# Altium PCB ESP12E.PcbDoc
Units mm, origin at the board's own origin, x right, y up, seen from the top; angles counter-clockwise.
Board outline 24.13 x 27.94 mm, 2 copper layers (Top Layer, Bottom Layer); 14 components, 22 nets, 70 pads, 7 vias.
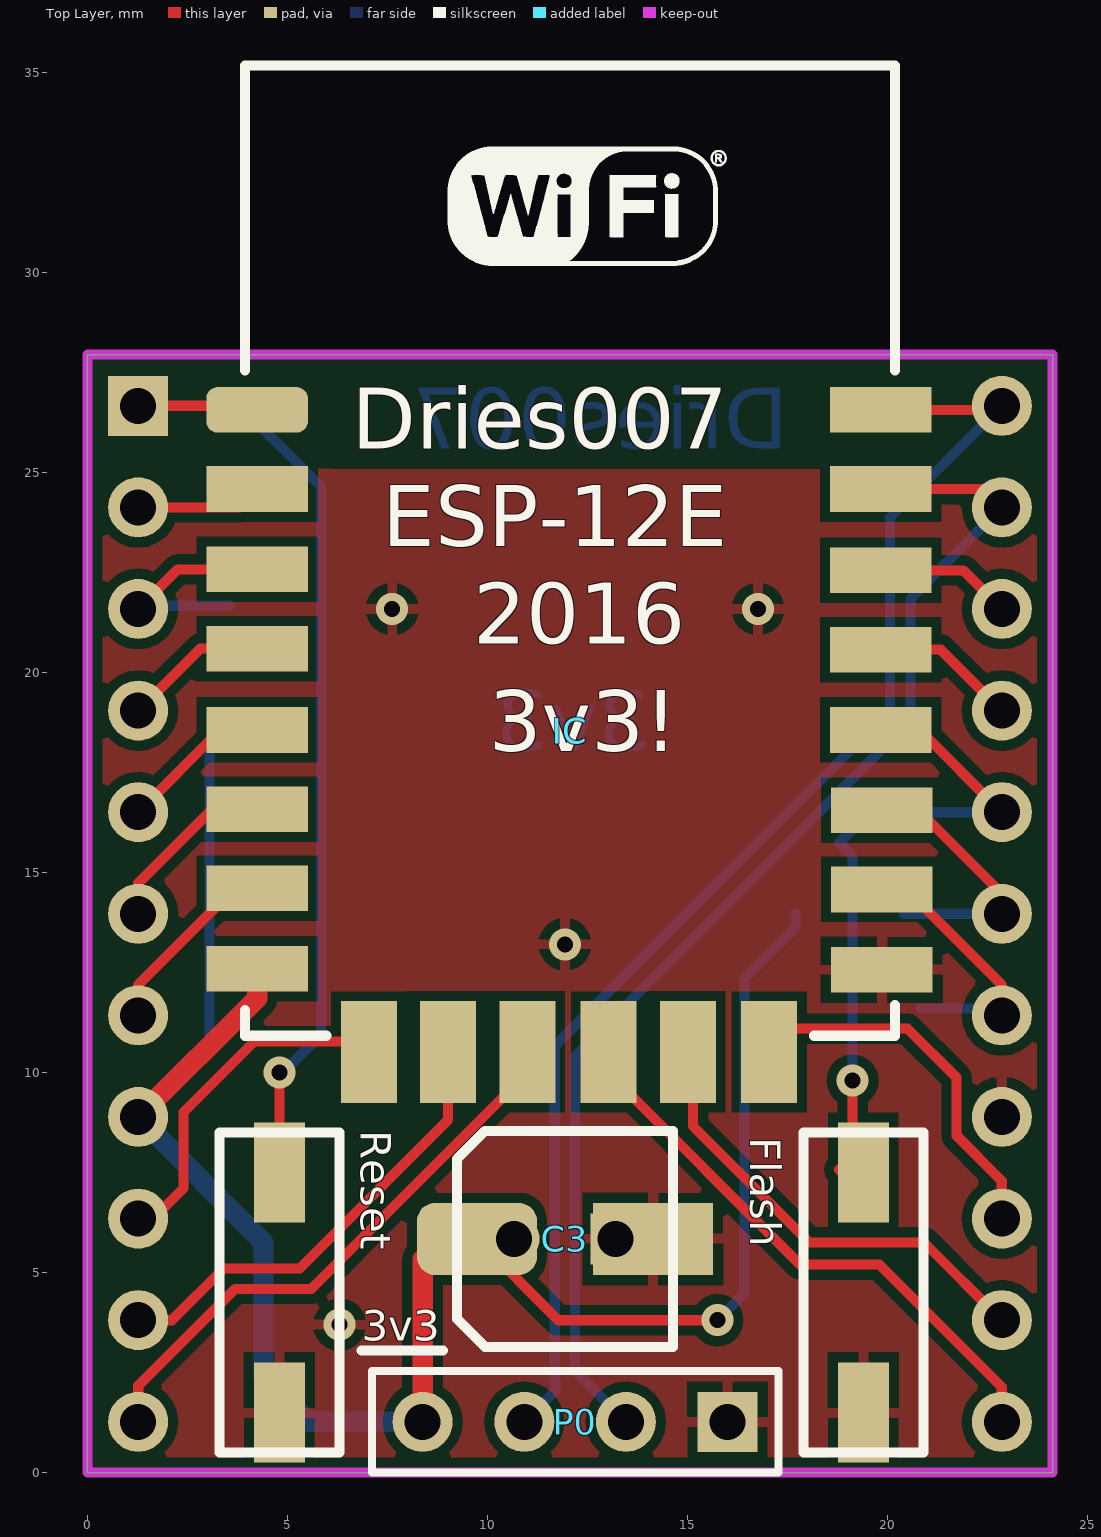
[diagram p0: Top Layer view]
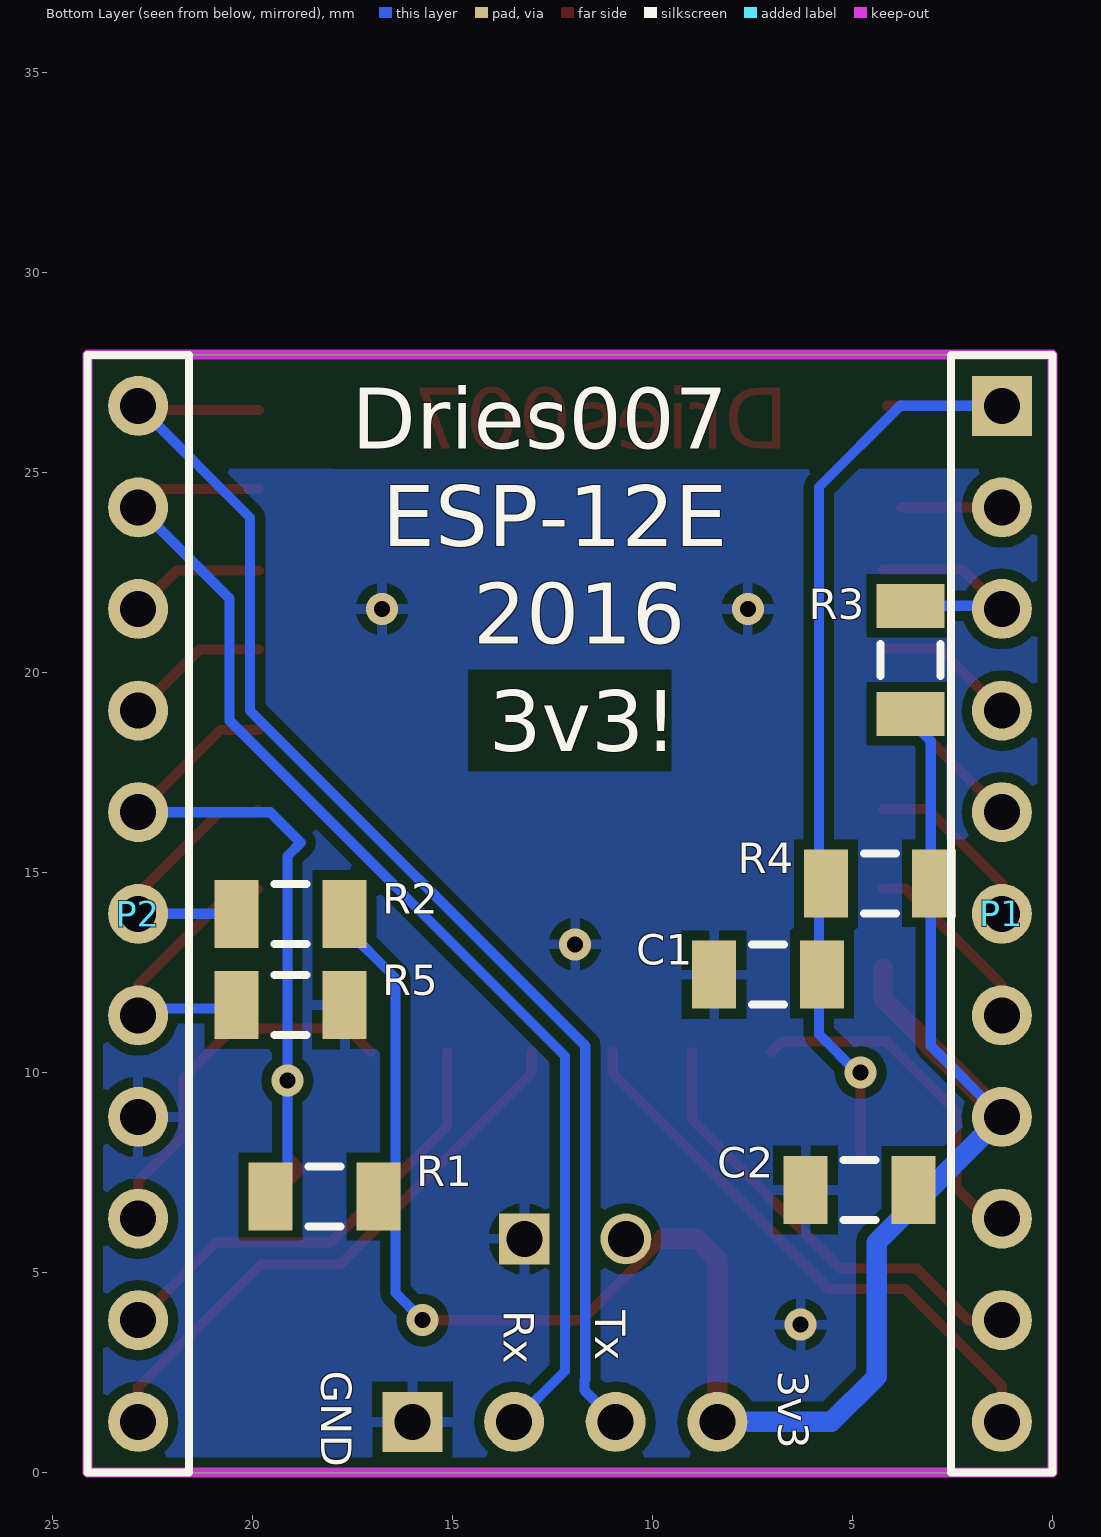
[diagram p1: Bottom Layer view, seen from below]

## Layer stack, top to bottom
Top Solder: solder mask 0.0102, Solder Resist, Dk 3.5
Top Layer: signal copper 0.0356
Dielectric 1: dielectric 0.32, FR-4, Dk 4.8
Bottom Layer: signal copper 0.0356
Bottom Solder: solder mask 0.0102, Solder Resist, Dk 3.5

## Board outline
0,0 24.13,0 24.13,27.94 0,27.94

## Design rules (kind name [scope] priority, off if disabled: settings)
Clearance [All] p1: gap=0.254
PolygonConnect [All] p1: connectstyle=Relief reliefconductorwidth=0.254 reliefentries=4 polygonreliefangle="90 Angle" airgapwidth=0.254
RoutingVias [All] p1: holewidth=0.711 width=1.27 viastyle="Through Hole" minholewidth=0.711 minwidth=1.27 maxholewidth=0.711 maxwidth=1.27
SolderMaskExpansion [All] p1: expansion=0.102
Width [All] p1: maxlimit=2.54 minlimit=0.254 preferedwidth=0.254 minimp=50.000000 maximp=50.000000 favimp=50.000000
30 further rules are at their usual default settings.

## Components (designator, comment, footprint, x,y, rotation, side; value= is the part's Value field where it differs from the comment)
C1 "Cap Semi" C1206 7.112,12.446 r0 bottom
C2 "Cap Semi" C1206 4.826,7.064 r0 bottom
C3 "" "SMD CAP 6X5" 11.938,5.842 r0 top
Flash "Flash" SMDSWITCH 19.4,4.5 r90 top (schematic designator GPIO0)
IC "ESP8266 ESP-12-E" "ESP8266 ESP-12-E" 20.828,10.16 r0 top
P0 "Serial" HDR1X4 16.002,1.27 r180 top
P1 "Header 11" HDR1X11#1 1.27,26.67 r270 bottom
P2 "Header 11" HDR1X11#2 22.86,26.67 r270 bottom
R1 "Res2" C1206 18.2,6.9 r180 bottom
R2 "Res2" C1206 19.05,13.97 r180 bottom
R3 "Res2" C1206 3.556,20.32 r270 bottom
R4 "Res2" C1206 4.318,14.732 r180 bottom
R5 "Res2" C1206 19.05,11.684 r0 bottom
Reset "Reset" SMDSWITCH 4.8,4.5 r270 top (schematic designator RST)

## Footprints (in the part's own frame and the unit in brackets; to place one, negate y for a bottom-side part, rotate by r counter-clockwise, add the part's x,y. Pads: shape width x height; smd on the part's side, far side on the other; paste and mask are expansions set on the pad)
C1206 [mm] "Chip Capacitor, Body 3.2x1.6mm, IPC High Density"
  rect 1.1x1.7 smd: 1(-1.35,0) 2(1.35,0)
  silkscreen extent -0.4,-0.75 0.4,0.75, body extent -1.7,-0.9 1.7,0.9, height 1.3
"ESP8266 ESP-12-E" [mil] "ESP8266 ESP-12-E"
  rrect50% 100x45 smd: 1(-653,646)
  rect 100x45 smd: 2(-653,568) 3(-653,489) 4(-653,411) 5(-653,331) 6(-653,253) 7(-653,175) 8(-653,96) 15(-38,95) 16(-38,174) 17(-38,252) 18(-39,331) 19(-39,410) 20(-39,488) 21(-39,568) 22(-39,646)
  rect 55x100 smd: 9(-543,14) 10(-465,14) 11(-387,14) 12(-307,14) 13(-229,14) 14(-149,14)
  silkscreen extent -665,30 -25,985
HDR1X4 [mm] "Connector; Header; 4 Position"
  rect 1.5x1.5 hole 0.9: 1(0,0)
  round 1.5 hole 0.9: 2(2.54,0) 3(5.08,0) 4(7.62,0)
  silkscreen extent -1.27,-1.27 8.89,1.27
HDR1X11#1 [mm] "Connector; Header; 11 Position"
  rect 1.5x1.5 hole 0.9: 1(0,0)
  round 1.5 hole 0.9: 2(2.54,0) 3(5.08,0) 4(7.62,0) 5(10.16,0) 6(12.7,0) 7(15.24,0) 8(17.78,0) 9(20.32,0) 10(22.86,0) 11(25.4,0)
  silkscreen extent -1.27,-1.27 26.67,1.27
HDR1X11#2 [mm] "Connector; Header; 11 Position"
  round 1.5 hole 0.9: 1(0,0) 2(2.54,0) 3(5.08,0) 4(7.62,0) 5(10.16,0) 6(12.7,0) 7(15.24,0) 8(17.78,0) 9(20.32,0) 10(22.86,0) 11(25.4,0)
  silkscreen extent -1.27,-1.27 26.67,1.27
"SMD CAP 6X5" [mm]
  rrect50% 3x1.8 smd: 1(-2.2,0)
  round 1.27 hole 0.9: 1(-1.27,0)
  rect 1.27x1.27 hole 0.9: 2(1.27,0)
  rect 3x1.8 smd: 2(2.2,0)
  silkscreen extent -2.7,-2.7 2.7,2.7
SMDSWITCH [mm]
  rect 2.5x1.27 smd: 1(3,0) 2(-3,0)
  silkscreen extent -4,-1.5 4,1.5

## Part data
C1 C2: "Capacitor (Semiconductor SIM Model)"
C3: library part "Cap Pol1", "Polarized Capacitor (Radial)"
Flash Reset: library part SW-PB, "Switch"
P0: library part "Header 4", "Header, 4-Pin"
P1 P2: "Header, 11-Pin"
R1 R2 R3 R4 R5: "Resistor"

## Via types
v1: diameter 0.8, hole 0.4, Top Layer to Bottom Layer, tented both sides, 7 vias

## Nets (pads, with @x,y where several pads share a name; then routed paths per layer and width w, separated by ;. In a path a pad name is that pad's centre, name@x,y a point inside that pad or via, vN(x,y) a via of type N, cw(c..) or ccw(c..) an arc to the next point about the centre after c; other vN are vias at no path point)
GND: C1.2 C2.2 C3.2 Flash.2 IC.15 P0.1 P2.8 R5.1 Reset.1
  other v1: 6.3,3.7 11.938,13.208 7.62,21.59 16.764,21.59
NetC1_1: C1.1 IC.1 P1.1 R4.1 Reset.2 | length 25.5
  Top Layer w0.254: P1.1 IC.1@4.14,26.67 ; Reset.2@4.8,7.9 v1(4.8,10)
  Bottom Layer w0.254: P1.1 3.81,26.67 5.842,24.638 5.842,10.958 4.884,10 v1(4.8,10)
NetGPIO0_1: Flash.1 IC.18 P2.5 R1.1 | length 20.8
  Top Layer w0.254: v1(19.13,9.8) 19.13,7.906 18.796,7.572 Flash.1@19.304,7.064 ; IC.18 20.803,18.567 P2.5
  Bottom Layer w0.254: R1.1 19.13,7.32 19.13,9.97 v1(19.13,9.8) 19.13,15.414 18.796,15.748 19.558,16.51 P2.5
NetIC_2: IC.2 P1.2 | length 2.5
  Top Layer w0.254: P1.2 IC.2@3.785,24.13
NetIC_3: IC.3 P1.3 R3.1 | length 5.7
  Top Layer w0.254: P1.3 2.261,22.581 IC.3
  Bottom Layer w0.254: P1.3 1.35,21.67 R3.1
NetIC_4: IC.4 P1.4 | length 3.6
  Top Layer w0.254: P1.4 2.819,20.599 IC.4
NetIC_5: IC.5 P1.5 | length 3.8
  Top Layer w0.254: P1.5 3.327,18.567 IC.5
NetIC_6: IC.6 P1.6 | length 4.5
  Top Layer w0.254: P1.6 1.27,14.732 3.124,16.586 IC.6
NetIC_7: IC.7 P1.7 | length 4.7
  Top Layer w0.254: P1.7 1.27,12.192 3.683,14.605 IC.7
NetIC_9: IC.9 P1.9 | length 8.8
  Top Layer w0.254: P1.9 1.641,6.35 2.401,7.11 2.401,9.005 4.177,10.781 6.77,10.781 IC.9
NetIC_10: IC.10 P1.10 | length 11.5
  Top Layer w0.254: P1.10 2.11,3.81 3.4,5.1 5.3,5.1 9.017,8.817 IC.10
NetIC_11: IC.11 P1.11 | length 14.4
  Top Layer w0.254: P1.11 1.27,2.17 3.692,4.592 5.601,4.592 10.998,9.989 IC.11
NetIC_12: IC.12 P2.11 | length 14.5
  Top Layer w0.254: IC.12 13.03,9.989 17.82,5.2 19.8,5.2 22.86,2.14 P2.11
NetIC_13: IC.13 P2.10 | length 11.6
  Top Layer w0.254: IC.13@15.138,10.516 15.138,8.662 18.046,5.754 20.916,5.754 P2.10
NetIC_14: IC.14 P2.9 | length 9.4
  Top Layer w0.254: IC.14 17.628,11.1 20.5,11.1 21.729,9.871 21.729,8.422 22.86,7.291 P2.9
NetIC_16: IC.16 P2.7 R5.2 | length 6.6
  Top Layer w0.254: IC.16 20.472,14.58 22.86,12.192 P2.7
  Bottom Layer w0.254: R5.2@20.828,11.604 P2.7@22.686,11.604
NetIC_17: IC.17 P2.6 R2.1 | length 6.8
  Top Layer w0.254: IC.17 19.914,16.51 20.828,16.51 22.86,14.478 P2.6
  Bottom Layer w0.254: R2.1 P2.6
NetIC_19: IC.19 P2.4 | length 3.7
  Top Layer w0.254: IC.19 21.336,20.574 P2.4
NetIC_20: IC.20 P2.3 | length 3.4
  Top Layer w0.254: IC.20 21.895,22.555 P2.3
NetIC_21: IC.21 P0.2 P2.2 | length 31
  Top Layer w0.254: IC.21 22.403,24.587 P2.2
  Bottom Layer w0.254: P0.2 12.192,2.54 12.192,10.414 20.574,18.796 20.574,21.844 P2.2
NetIC_22: IC.22 P0.3 P2.1 | length 33.3
  Top Layer w0.254: IC.22 P2.1@22.758,26.568
  Bottom Layer w0.254: P0.3 11.7,2.048 11.7,2.314 11.684,2.33 11.684,10.668 20.066,19.05 20.066,23.876 P2.1
VDD: C2.1 C3.1 IC.8 P0.4 P1.8 R1.2 R2.2 R3.2 R4.2 | length 51.6
  Top Layer w0.254: C3.1@9.738,5.842 11.77,3.81 v1(15.748,3.81)
  Top Layer w0.508: P1.8 4.242,11.862 IC.8 ; P0.4 8.382,5.334 8.89,5.842 C3.1@9.738,5.842
  Bottom Layer w0.254: P1.8 3.048,10.668 3.048,18.288 R3.2@3.643,18.883 ; v1(15.748,3.81) 16.43,4.492 16.43,6.858 16.43,12.366 17.7,13.636 R2.2
  Bottom Layer w0.508: P1.8 4.4,5.76 4.4,2.4 5.53,1.27 P0.4

## Polygon pours and split planes (outlines as drawn)
GND on Top Layer "Top Layer-No Net" (solid, remove dead copper, pour order 0): 0,25.1 0,0 24.13,0 24.13,25.1
GND on Bottom Layer "AutoNaming" (solid, remove dead copper, pour order 2): 0,25.1 0,0 24.13,0 24.13,25.1

## Keep-outs
Keep-Out Layer:
  lines w0.254: 0,0 0,27.95 24.125,27.95 24.125,0 0,0

## Other copper
Top Layer:
  text "Dries007" at 6.6,25.59 h1.52
Bottom Layer:
  text "Dries007" at 17.525,25.59 h1.52
  text "3v3" at 14.1,18.04 h1.52

## Silkscreen, mask and mechanical layers (free items; w line width, h text height)
Top Overlay:
  lines w0.254: 6.858,3.048 8.89,3.048
  text "Dries007" at 6.604,25.601 h1.52
  text "ESP-12E" at 7.366,23.164 h1.52
  text "2016" at 9.651,20.726 h1.52
  text "3v3!" at 10.032,18.034 h1.52
  text "3v3" at 6.858,3.302 h0.76
Bottom Overlay:
  text "Dries007" at 17.526,25.601 h1.52
  text "ESP-12E" at 16.764,23.164 h1.52
  text "2016" at 14.479,20.726 h1.52
  text "3v3!" at 14.098,18.034 h1.52
  text "Tx" at 11.43,4.064 h0.76 r90
  text "Rx" at 13.716,4.064 h0.76 r90
  text "3v3" at 6.858,2.54 h0.76 r90
  text "GND" at 18.288,2.54 h0.76 r90
Mechanical 1:
  the board outline again, w0.254

## Text inside footprints (layer, text, board x,y; h text height)
IC: Mechanical 13 "CUTOUT POLYGON" at 4.243,34.051 h0.25; Mechanical 13 "ANTENNA AREA" at 4.243,34.559 h0.25